# Altium PCB LQFP (32-100 PIN) 0.5mm.PcbDoc
Units mm, origin at the board's own origin, x right, y up, seen from the top; angles counter-clockwise.
Board outline 40.9 x 33.2 mm, 2 copper layers (Top Layer, Bottom Layer), stack 1.569 mm thick; 5 components, 48 nets, 200 pads, 0 vias.
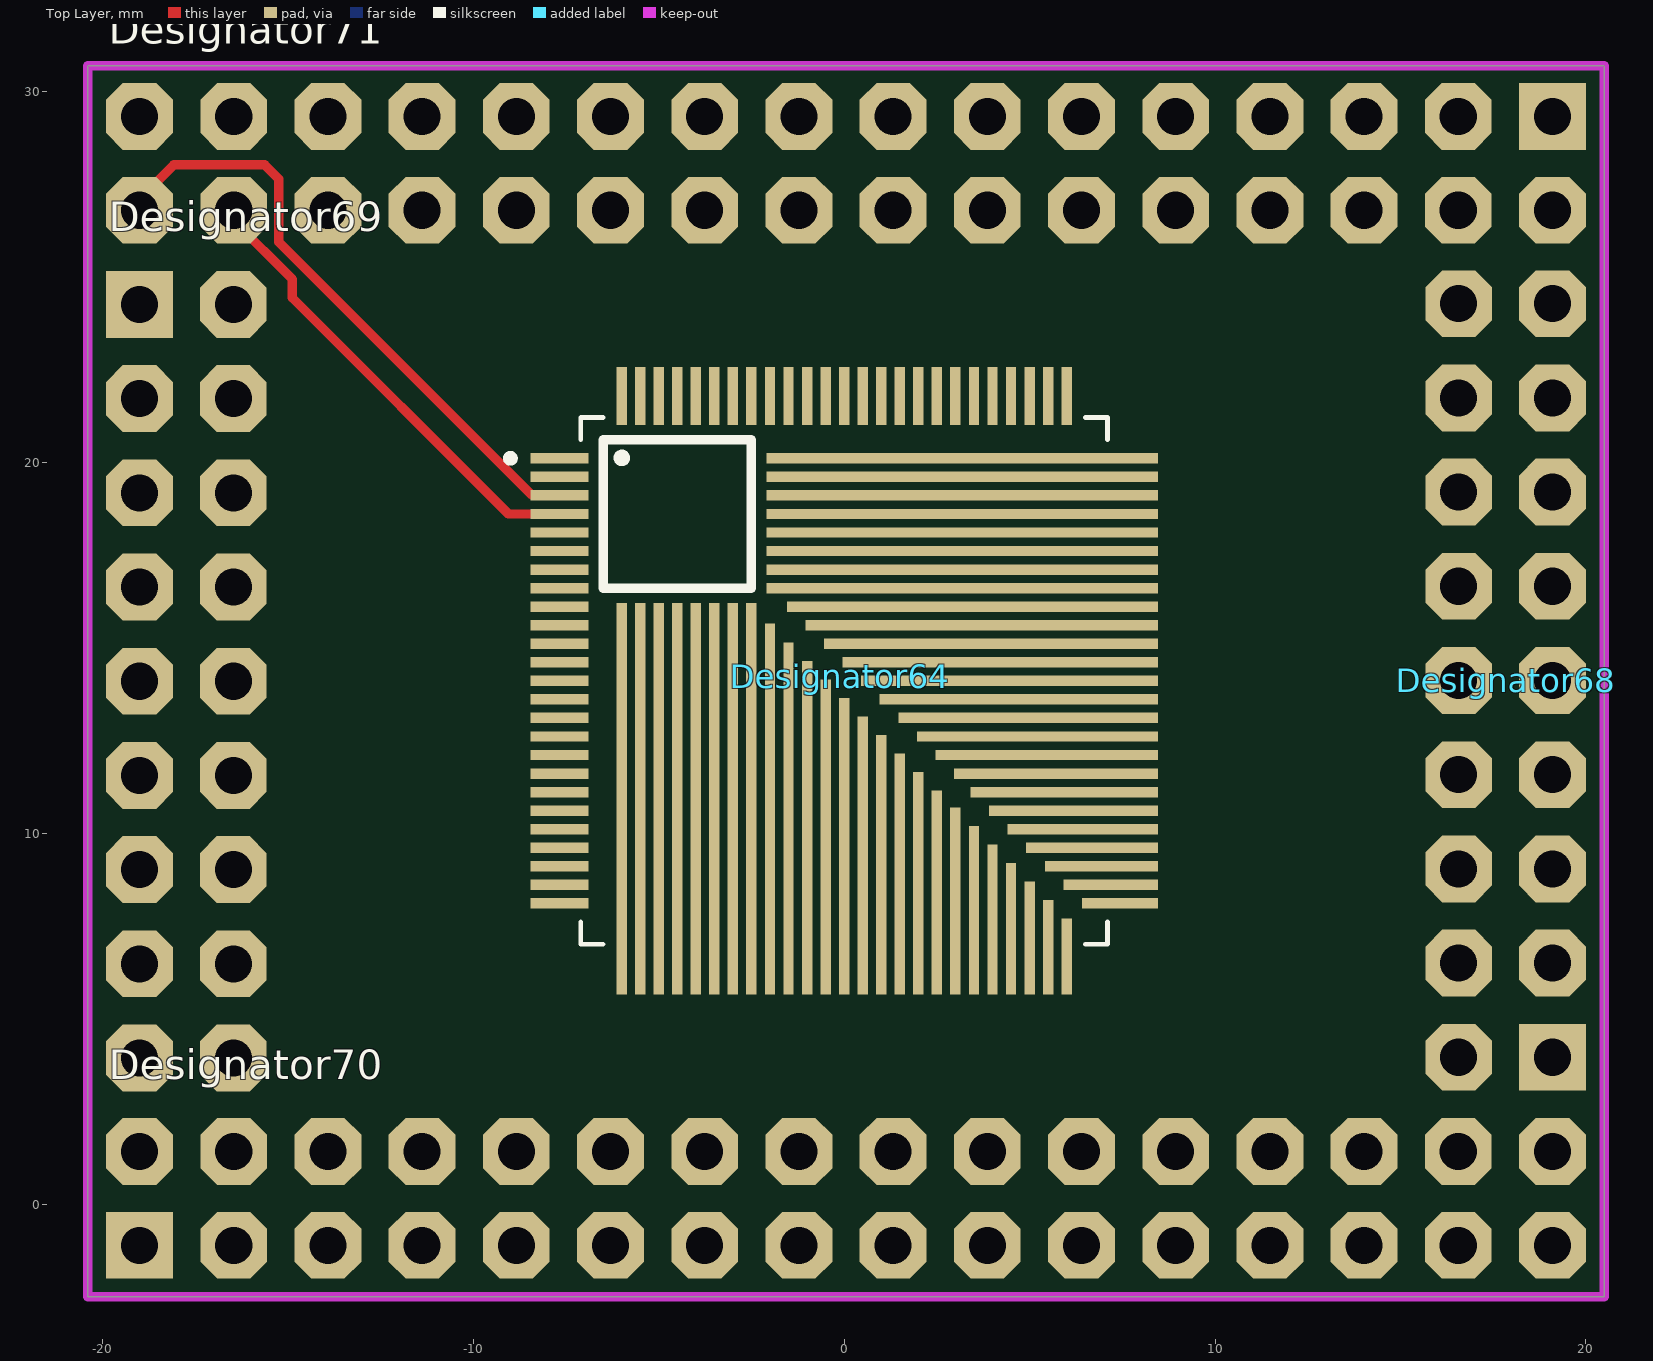
[diagram p0: Top Layer view]
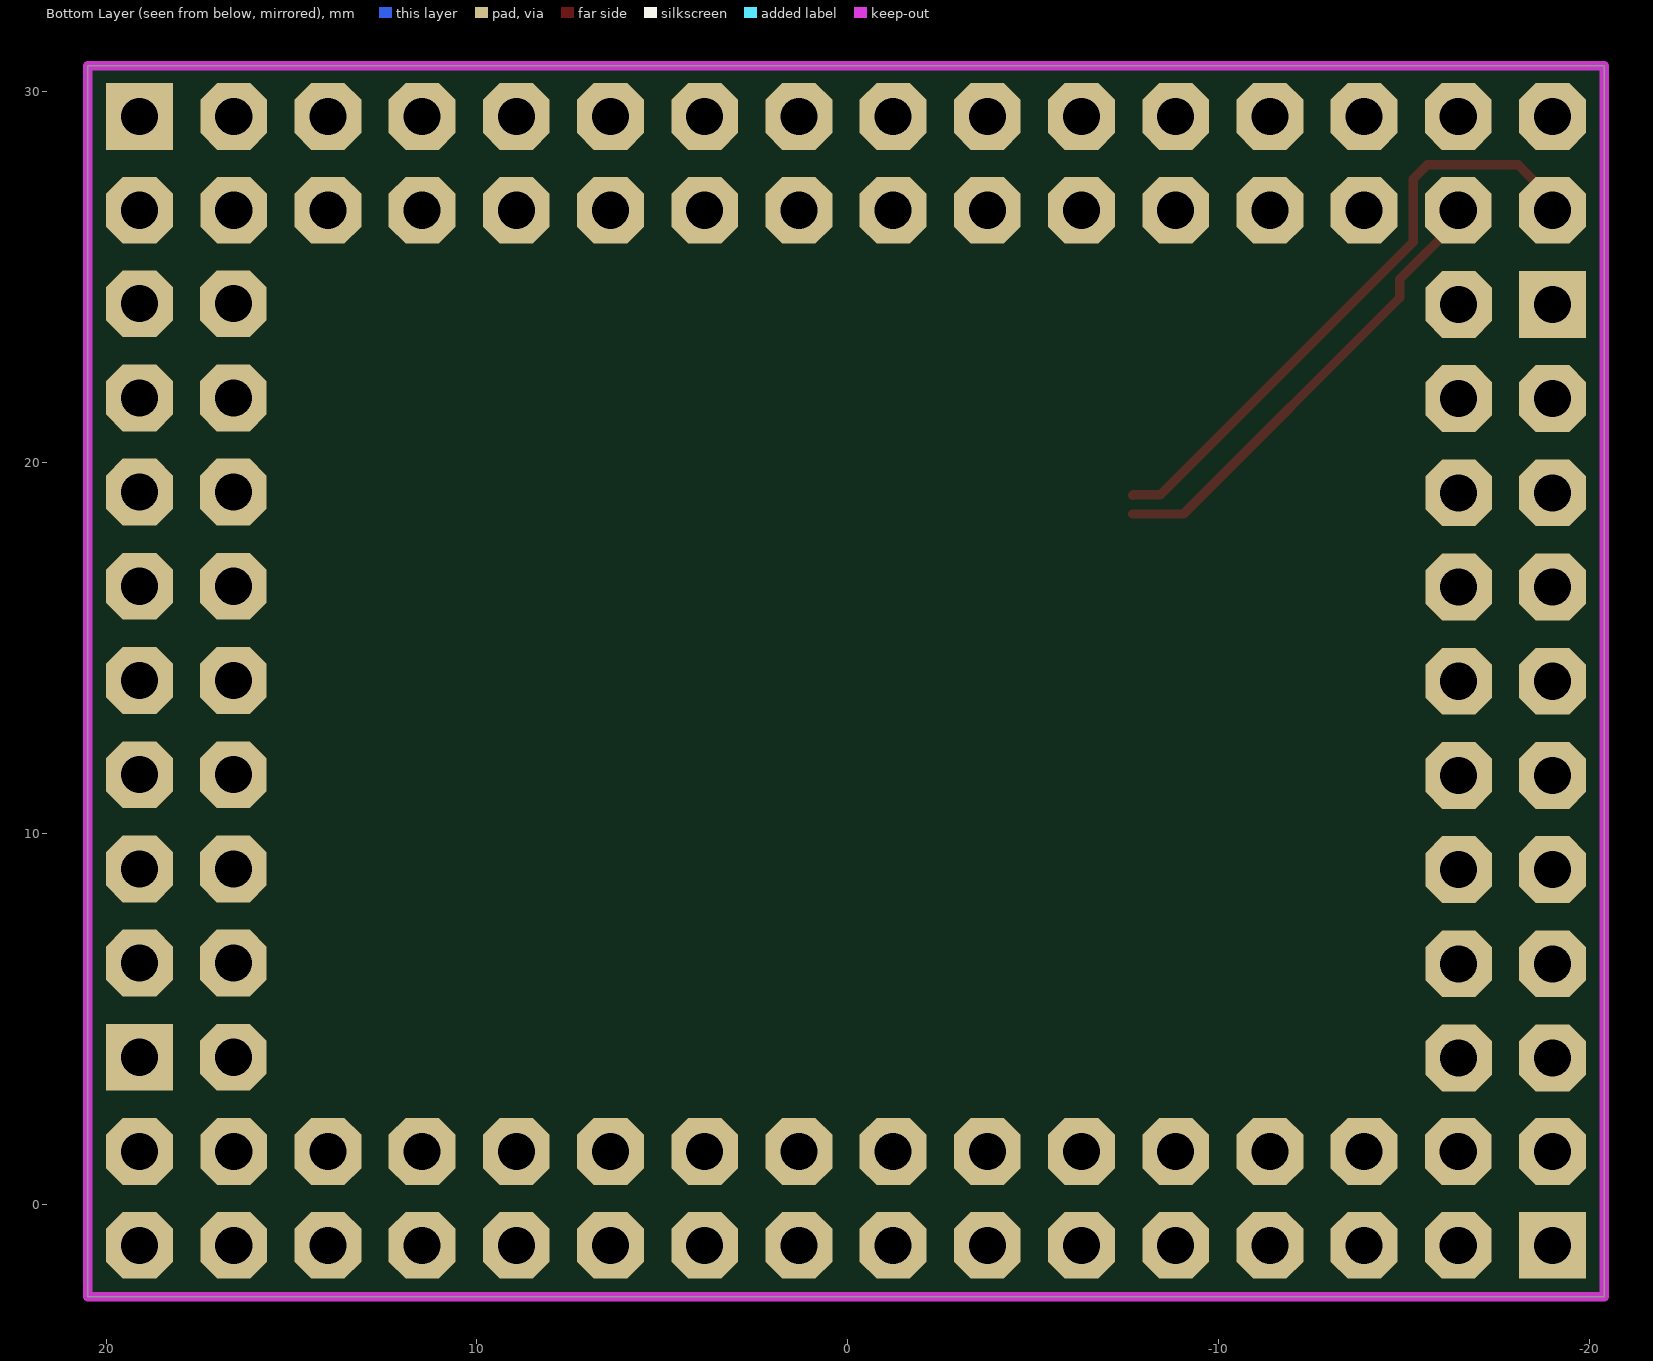
[diagram p1: Bottom Layer view, seen from below]

## Layer stack, top to bottom
Top Solder: solder mask 0.0102, Solder Resist, Dk 3.5
Top Layer: signal copper 0.035
Dielectric 1: core 1.4986, Core-043, Dk 4.3
Bottom Layer: signal copper 0.035
Bottom Solder: solder mask 0.0102, Solder Resist, Dk 3.5

## Board outline
-20.4,-2.5 -20.4,30.7 20.5,30.7 20.5,-2.5

## Design rules (kind name [scope] priority, off if disabled: settings)
Clearance [All] p1: gap=0.45 ignorepadtopadclearanceinfootprint=FALSE except(0.2: Arc-Arc Arc-Track Arc-SMDPad Arc-THPad Arc-Text Track-Track Track-SMDPad Track-THPad Track-Text SMDPad-SMDPad SMDPad-THPad SMDPad-Text THPad-THPad THPad-Text Via-Text Fill-Text Poly-Text Region-Text Text-Text)
ComponentClearance [All] p1 off: gap=0.254 collisioncheckmode=3 verticalgap=0.254 showdistances=FALSE
Height [All] p1 off: minheight=0 maxheight=25.4 prefheight=12.7
PolygonConnect [All] p1: connectstyle=Relief reliefconductorwidth=0.254 reliefentries=4 polygonreliefangle="90 Angle" airgapwidth=0.254
RoutingVias [All] p1: holewidth=0.711 width=1.27 viastyle="Through Hole" minholewidth=0.711 minwidth=1.27 maxholewidth=0.711 maxwidth=1.27
SolderMaskExpansion [All] p1: expansion=0.102 istentingtop=FALSE
Width [All] p1: maxlimit=0.6 minlimit=0.2 preferedwidth=0.3
28 further rules are at their usual default settings.

## Components (designator, comment, footprint, x,y, rotation, side; value= is the part's Value field where it differs from the comment)
Designator64 "Comment" "LQFP (32-100 PIN) 0.5mm" 0,14.11 r0 top locked
Designator68 "Comment" "Double Row 18P 2.54mm" 19.12,14.11 r90 top locked
Designator69 "Comment" "Double Row 18P 2.54mm" -19.02,14.11 r270 top locked
Designator70 "Comment" "Double Row 32P 2.54mm" 0.05,-1.11 r0 top locked
Designator71 "Comment" "Double Row 32P 2.54mm" 0.05,29.33 r180 top locked

## Footprints (in the part's own frame and the unit in brackets; to place one, negate y for a bottom-side part, rotate by r counter-clockwise, add the part's x,y. Pads: shape width x height; smd on the part's side, far side on the other; paste and mask are expansions set on the pad)
"Double Row 18P 2.54mm" [mm]
  rect 1.8x1.8 hole 1: 1(-10.15,0.02)
  oct 1.8x1.8 hole 1: 2(-10.15,2.55) 3(-7.61,0.02) 4(-7.61,2.55) 5(-5.07,0.02) 6(-5.07,2.55) 7(-2.53,0.02) 8(-2.53,2.55) 9(0.01,0.02) 10(0.01,2.55) 11(2.55,0.02) 12(2.55,2.55) 13(5.09,0.02) 14(5.09,2.55) 15(7.63,0.02) 16(7.63,2.55) 17(10.17,0.02) 18(10.17,2.55)
"Double Row 32P 2.54mm" [mm]
  rect 1.8x1.8 hole 1: 1(-19.05,0)
  oct 1.8x1.8 hole 1: 2(-19.05,2.53) 3(-16.51,0) 4(-16.51,2.53) 5(-13.97,0) 6(-13.97,2.53) 7(-11.43,0) 8(-11.43,2.53) 9(-8.89,0) 10(-8.89,2.53) 11(-6.35,0) 12(-6.35,2.53) 13(-3.81,0) 14(-3.81,2.53) 15(-1.27,0) 16(-1.27,2.53) 17(1.27,0) 18(1.27,2.53) 19(3.81,0) 20(3.81,2.53) 21(6.35,0) 22(6.35,2.53) 23(8.89,0) 24(8.89,2.53) 25(11.43,0) 26(11.43,2.53) 27(13.97,0) 28(13.97,2.53) 29(16.51,0) 30(16.51,2.53) 31(19.05,0) 32(19.05,2.53)
"LQFP (32-100 PIN) 0.5mm" [mm]
  rect 1.56x0.28 smd: 1(-7.68,6) 2(-7.68,5.5) 3(-7.68,5) 4(-7.68,4.5) 5(-7.68,4) 6(-7.68,3.5) 7(-7.68,3) 8(-7.68,2.5) 9(-7.68,2) 10(-7.68,1.5) 11(-7.68,1) 12(-7.68,0.5) 13(-7.68,0) 14(-7.68,-0.5) 15(-7.68,-1) 16(-7.68,-1.5) 17(-7.68,-2) 18(-7.68,-2.5) 19(-7.68,-3) 20(-7.68,-3.5) 21(-7.68,-4) 22(-7.68,-4.5) 23(-7.68,-5) 24(-7.68,-5.5) 25(-7.68,-6)
  rect 0.28x10.56 smd: 26(-6,-3.18) 27(-5.5,-3.18) 28(-5,-3.18) 29(-4.5,-3.18) 30(-4,-3.18) 31(-3.5,-3.18) 32(-3,-3.18) 33(-2.5,-3.18)
  rect 0.28x10 smd: 34(-2,-3.46)
  rect 0.28x9.5 smd: 35(-1.5,-3.71)
  rect 0.28x9 smd: 36(-1,-3.96)
  rect 0.28x8.5 smd: 37(-0.5,-4.21)
  rect 0.28x8 smd: 38(0,-4.46)
  rect 0.28x7.5 smd: 39(0.5,-4.71)
  rect 0.28x7 smd: 40(1,-4.96)
  rect 0.28x6.5 smd: 41(1.5,-5.21)
  rect 0.28x6 smd: 42(2,-5.46)
  rect 0.28x5.5 smd: 43(2.5,-5.71)
  rect 0.28x5.05 smd: 44(3,-5.935)
  rect 0.28x4.55 smd: 45(3.5,-6.185)
  rect 0.28x4.05 smd: 46(4,-6.435)
  rect 0.28x3.55 smd: 47(4.5,-6.685)
  rect 0.28x3.05 smd: 48(5,-6.935)
  rect 0.28x2.55 smd: 49(5.5,-7.185)
  rect 0.28x2.05 smd: 50(6,-7.435)
  rect 2.05x0.28 smd: 51(7.435,-6)
  rect 2.55x0.28 smd: 52(7.185,-5.5)
  rect 3.05x0.28 smd: 53(6.935,-5)
  rect 3.55x0.28 smd: 54(6.685,-4.5)
  rect 4.05x0.28 smd: 55(6.435,-4)
  rect 4.55x0.28 smd: 56(6.185,-3.5)
  rect 5.05x0.28 smd: 57(5.935,-3)
  rect 5.5x0.28 smd: 58(5.71,-2.5)
  rect 6x0.28 smd: 59(5.46,-2)
  rect 6.5x0.28 smd: 60(5.21,-1.5)
  rect 7x0.28 smd: 61(4.96,-1)
  rect 7.5x0.28 smd: 62(4.71,-0.5)
  rect 8x0.28 smd: 63(4.46,0)
  rect 8.5x0.28 smd: 64(4.21,0.5)
  rect 9x0.28 smd: 65(3.96,1)
  rect 9.5x0.28 smd: 66(3.71,1.5)
  rect 10x0.28 smd: 67(3.46,2)
  rect 10.56x0.28 smd: 68(3.18,2.5) 69(3.18,3) 70(3.18,3.5) 71(3.18,4) 72(3.18,4.5) 73(3.18,5) 74(3.18,5.5) 75(3.18,6)
  rect 0.28x1.56 smd: 76(6,7.68) 77(5.5,7.68) 78(5,7.68) 79(4.5,7.68) 80(4,7.68) 81(3.5,7.68) 82(3,7.68) 83(2.5,7.68) 84(2,7.68) 85(1.5,7.68) 86(1,7.68) 87(0.5,7.68) 88(0,7.68) 89(-0.5,7.68) 90(-1,7.68) 91(-1.5,7.68) 92(-2,7.68) 93(-2.5,7.68) 94(-3,7.68) 95(-3.5,7.68) 96(-4,7.68) 97(-4.5,7.68) 98(-5,7.68) 99(-5.5,7.68) 100(-6,7.68)
  silkscreen extent -9.1,-7.1 7.1,7.1, body extent -8,-8 8,8, height 1.48

## Nets (pads, with @x,y where several pads share a name; then routed paths per layer and width w, separated by ;. In a path a pad name is that pad's centre, name@x,y a point inside that pad or via, vN(x,y) a via of type N, cw(c..) or ccw(c..) an arc to the next point about the centre after c; other vN are vias at no path point)
3.3V: 
CE: 
CSN: 
GND: 
GNDBATT: 
GNDL: 
"LED Indicator": 
MISO: 
MOSI: 
NetC1_1: 
NetC1_2: 
NetC2_1: 
NetC5_2: 
NetC6_1: 
NetC6_2: 
NetC8_1: 
NetC10_1: 
NetC11_1: 
NetC20_2: 
NetCCR1_3: 
NetCON_2: 
NetD3_A: 
NetD4_A: 
NetD5_A: 
NetD6_K: 
NetD8_A: 
NetIC1_1: 
NetIC1_2: 
NetIC1_3: 
NetIC*1_3: 
NetIC*1_18: 
NetIC*1_21: 
NetIC*1_22: 
NetP1_2: 
NetP1_3: 
NetP1_4: 
NetQ1_1: 
NetQ1_3: 
NetQ3_1: 
NetR2_1: 
NetR10_2: 
PROG: 
RST: 
SCK: 
"Tombol Setting": 
VBATT: 
VCC: 
VCC2: 
pads on no net: Designator64.1 Designator64.2 Designator64.3 Designator64.4 Designator64.5 Designator64.6 Designator64.7 Designator64.8 Designator64.9 Designator64.10 Designator64.11 Designator64.12 Designator64.13 Designator64.14 Designator64.15 Designator64.16 Designator64.17 Designator64.18 Designator64.19 Designator64.20 Designator64.21 Designator64.22 Designator64.23 Designator64.24 Designator64.25 Designator64.26 Designator64.27 Designator64.28 Designator64.29 Designator64.30 Designator64.31 Designator64.32 Designator64.33 Designator64.34 Designator64.35 Designator64.36 Designator64.37 Designator64.38 Designator64.39 Designator64.40 Designator64.41 Designator64.42 Designator64.43 Designator64.44 Designator64.45 Designator64.46 Designator64.47 Designator64.48 Designator64.49 Designator64.50 Designator64.51 Designator64.52 Designator64.53 Designator64.54 Designator64.55 Designator64.56 Designator64.57 Designator64.58 Designator64.59 Designator64.60 Designator64.61 Designator64.62 Designator64.63 Designator64.64 Designator64.65 Designator64.66 Designator64.67 Designator64.68 Designator64.69 Designator64.70 Designator64.71 Designator64.72 Designator64.73 Designator64.74 Designator64.75 Designator64.76 Designator64.77 Designator64.78 Designator64.79 Designator64.80 Designator64.81 Designator64.82 Designator64.83 Designator64.84 Designator64.85 Designator64.86 Designator64.87 Designator64.88 Designator64.89 Designator64.90 Designator64.91 Designator64.92 Designator64.93 Designator64.94 Designator64.95 Designator64.96 Designator64.97 Designator64.98 Designator64.99 Designator64.100 Designator68.1 Designator68.2 Designator68.3 Designator68.4 Designator68.5 Designator68.6 Designator68.7 Designator68.8 Designator68.9 Designator68.10 Designator68.11 Designator68.12 Designator68.13 Designator68.14 Designator68.15 Designator68.16 Designator68.17 Designator68.18 Designator69.1 Designator69.2 Designator69.3 Designator69.4 Designator69.5 Designator69.6 Designator69.7 Designator69.8 Designator69.9 Designator69.10 Designator69.11 Designator69.12 Designator69.13 Designator69.14 Designator69.15 Designator69.16 Designator69.17 Designator69.18 Designator70.1 Designator70.2 Designator70.3 Designator70.4 Designator70.5 Designator70.6 Designator70.7 Designator70.8 Designator70.9 Designator70.10 Designator70.11 Designator70.12 Designator70.13 Designator70.14 Designator70.15 Designator70.16 Designator70.17 Designator70.18 Designator70.19 Designator70.20 Designator70.21 Designator70.22 Designator70.23 Designator70.24 Designator70.25 Designator70.26 Designator70.27 Designator70.28 Designator70.29 Designator70.30 Designator70.31 Designator70.32 Designator71.1 Designator71.2 Designator71.3 Designator71.4 Designator71.5 Designator71.6 Designator71.7 Designator71.8 Designator71.9 Designator71.10 Designator71.11 Designator71.12 Designator71.13 Designator71.14 Designator71.15 Designator71.16 Designator71.17 Designator71.18 Designator71.19 Designator71.20 Designator71.21 Designator71.22 Designator71.23 Designator71.24 Designator71.25 Designator71.26 Designator71.27 Designator71.28 Designator71.29 Designator71.30 Designator71.31 Designator71.32
copper on no net: | length 29.3
  Top Layer w0.254: -19,26.8 -19,27.1 -18.073,28.027 -15.627,28.027 -15.243,27.643 -15.243,25.943 -8.423,19.123 -7.693,19.123 -7.68,19.11 ; -16.46,26.8 -16.46,26.518 -14.884,24.942 -14.884,24.442 -9.052,18.61 -7.68,18.61

## Keep-outs
Keep-Out Layer:
  the board outline again, w0.254